# Altium PCB PCB1.PcbDoc
Units mil, origin at the board's own origin, x right, y up, seen from the top; angles counter-clockwise.
Board outline 2265 x 1515 mil, 4 copper layers (Top Layer, Layer 1, Layer 2, Bottom Layer), stack 23.756 mil thick; 41 components, 23 nets, 117 pads, 151 vias.
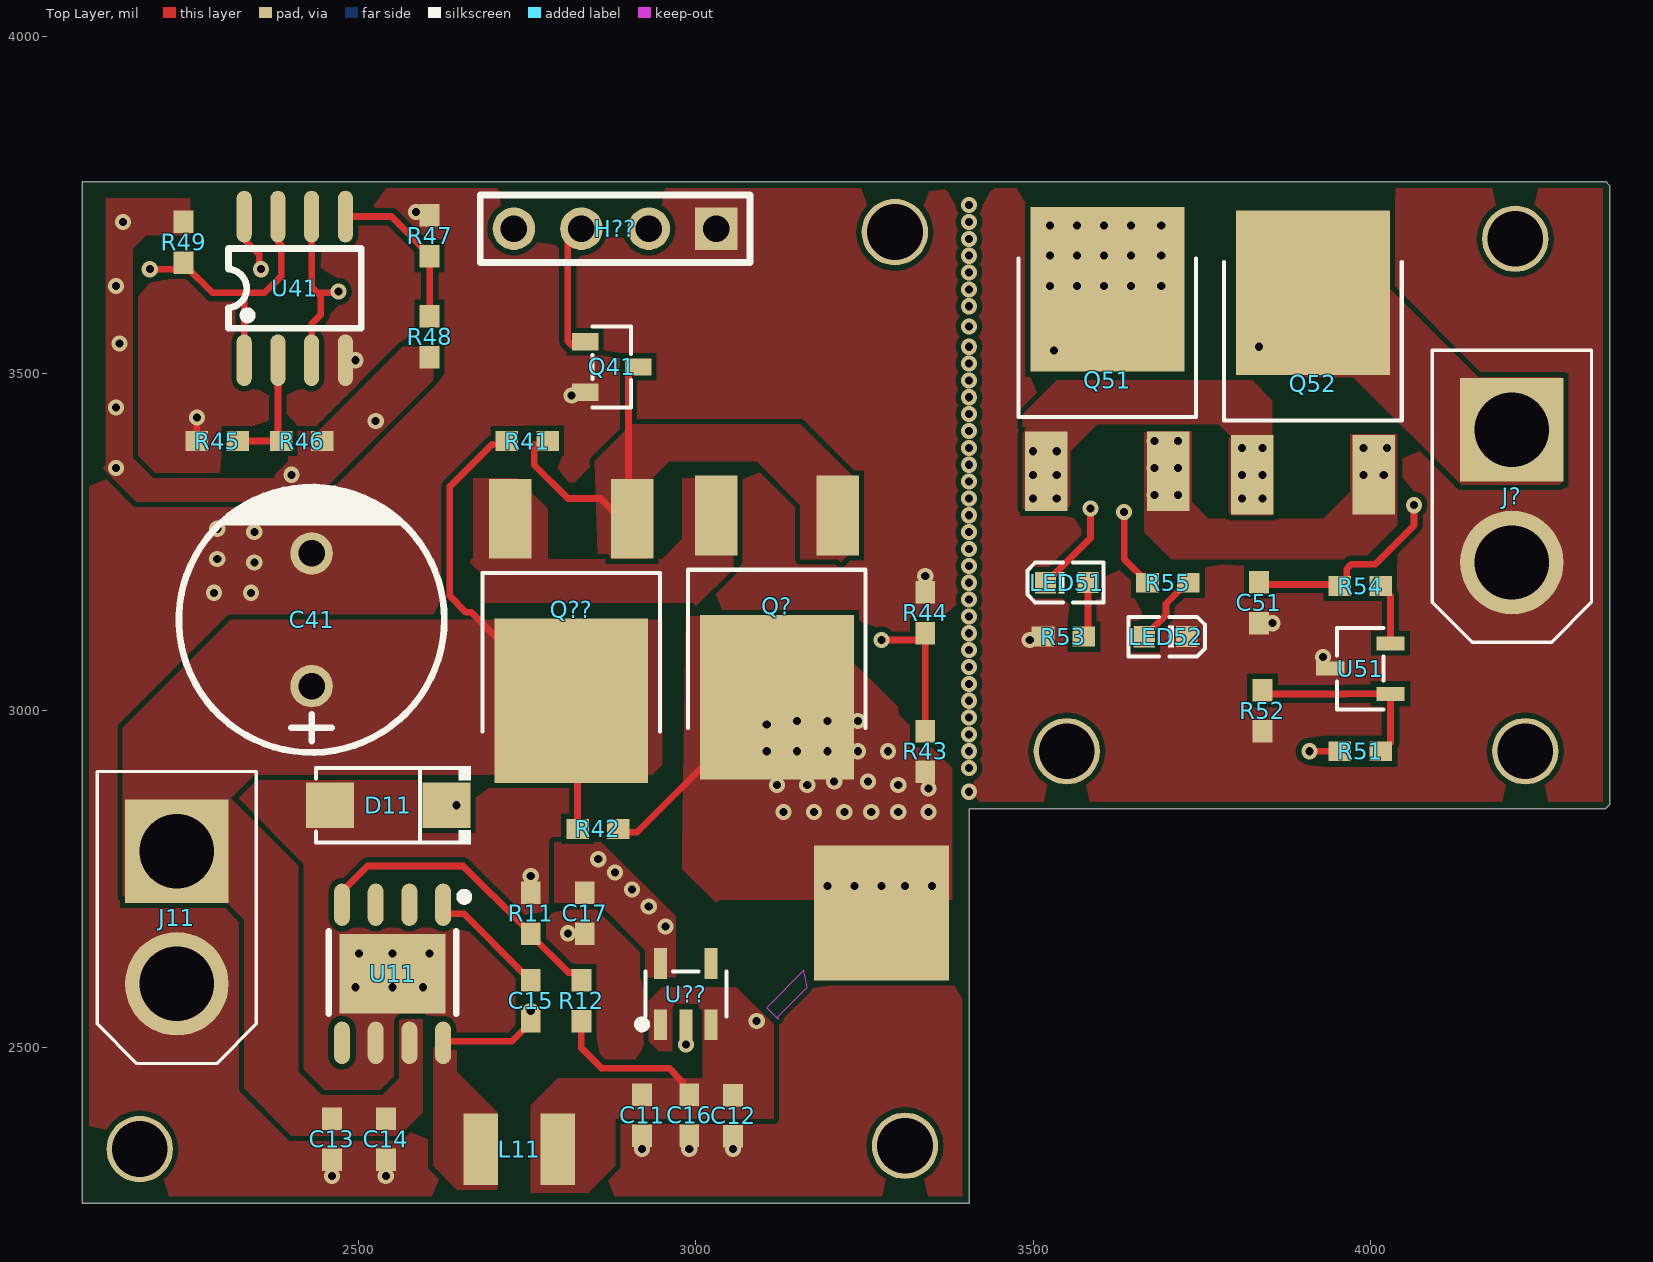
[diagram p0: Top Layer view]
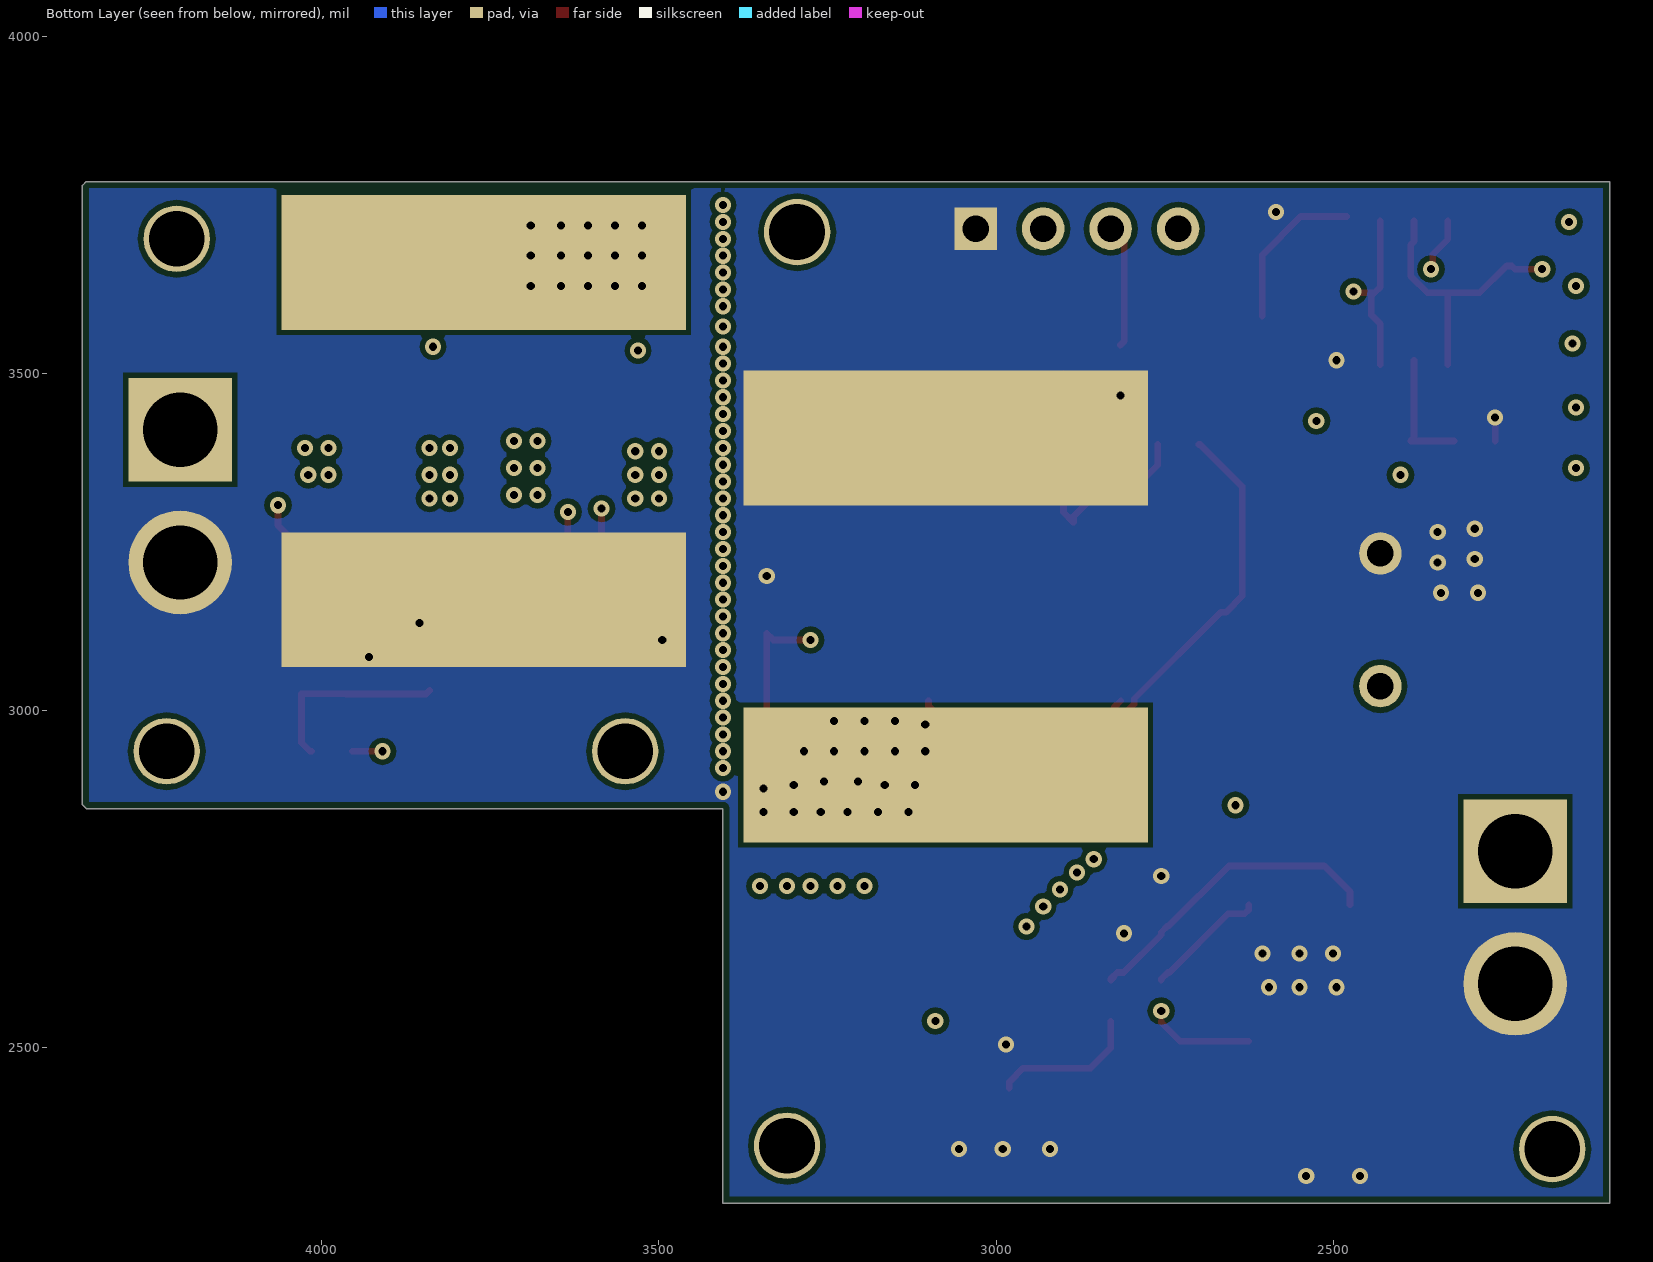
[diagram p1: Bottom Layer view, seen from below]
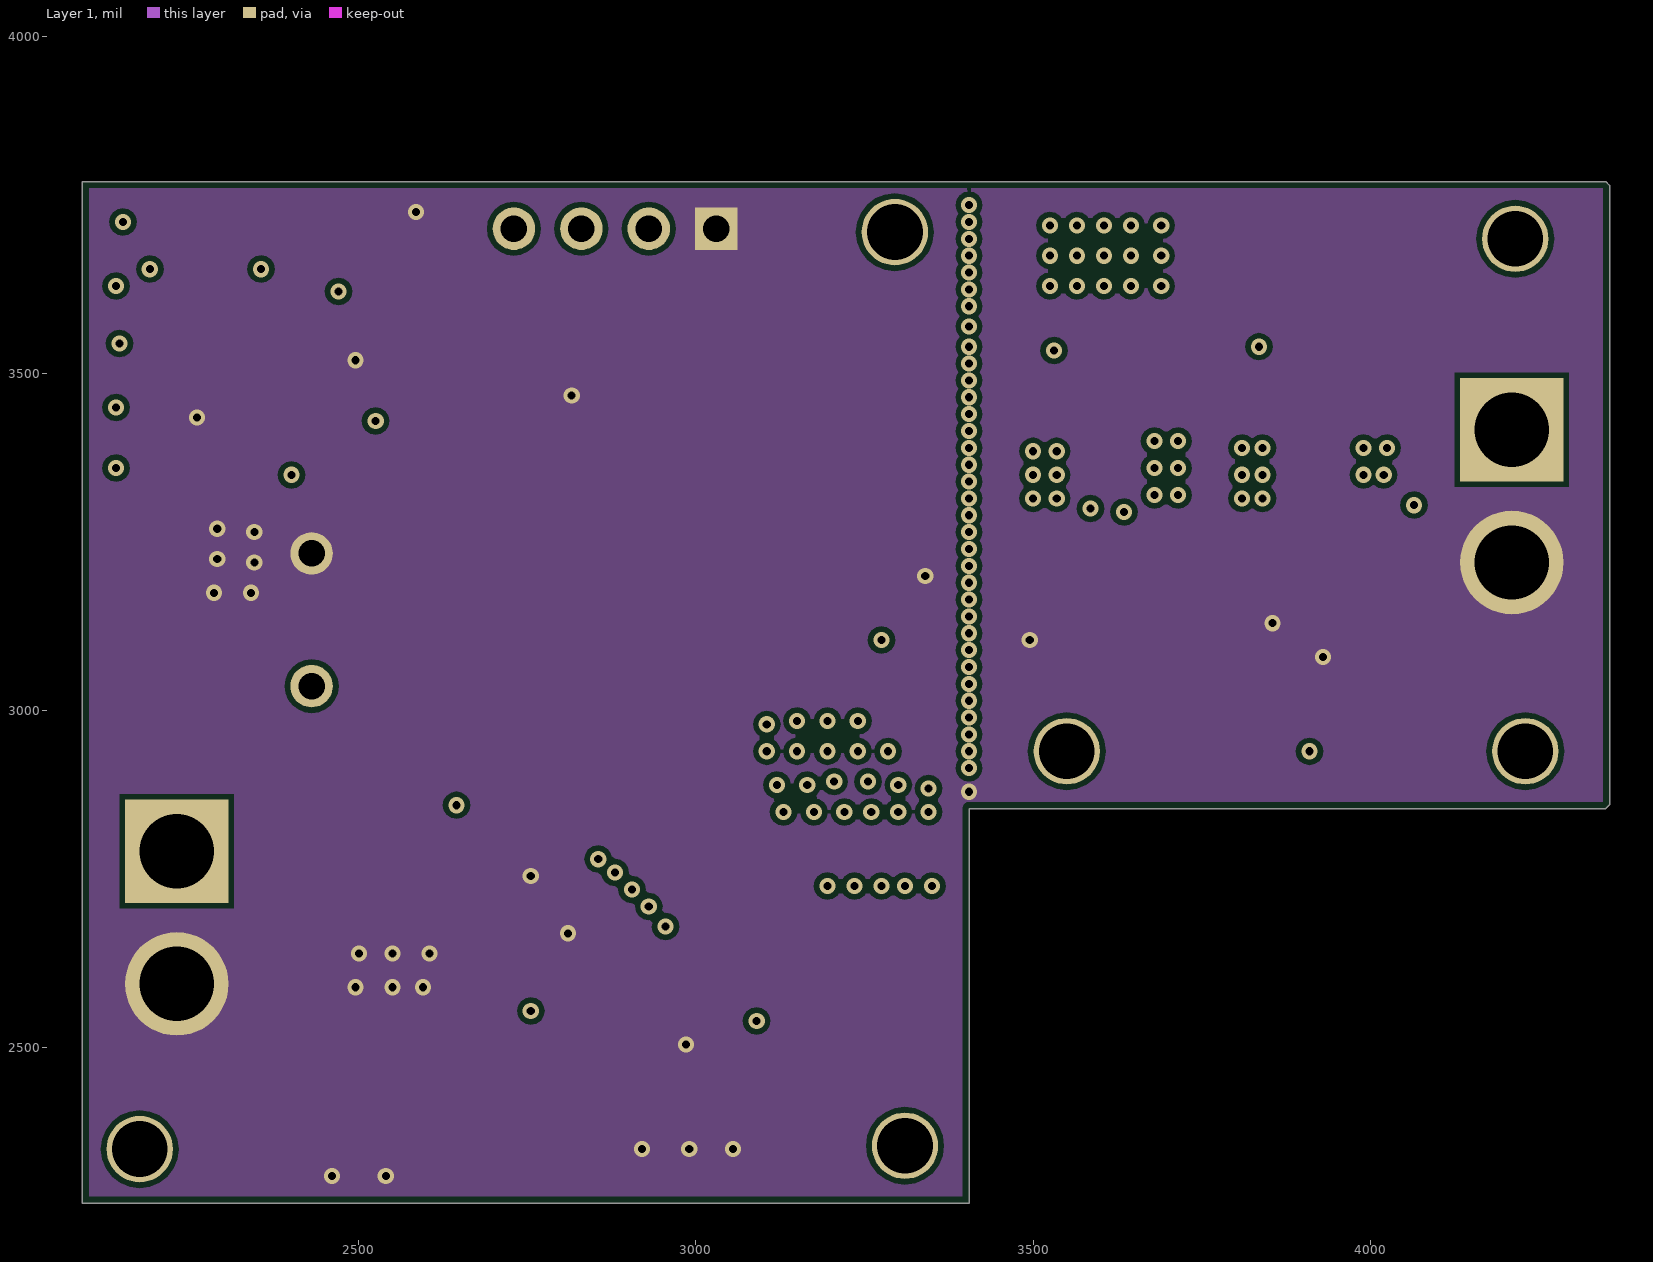
[diagram p2: Layer 1]
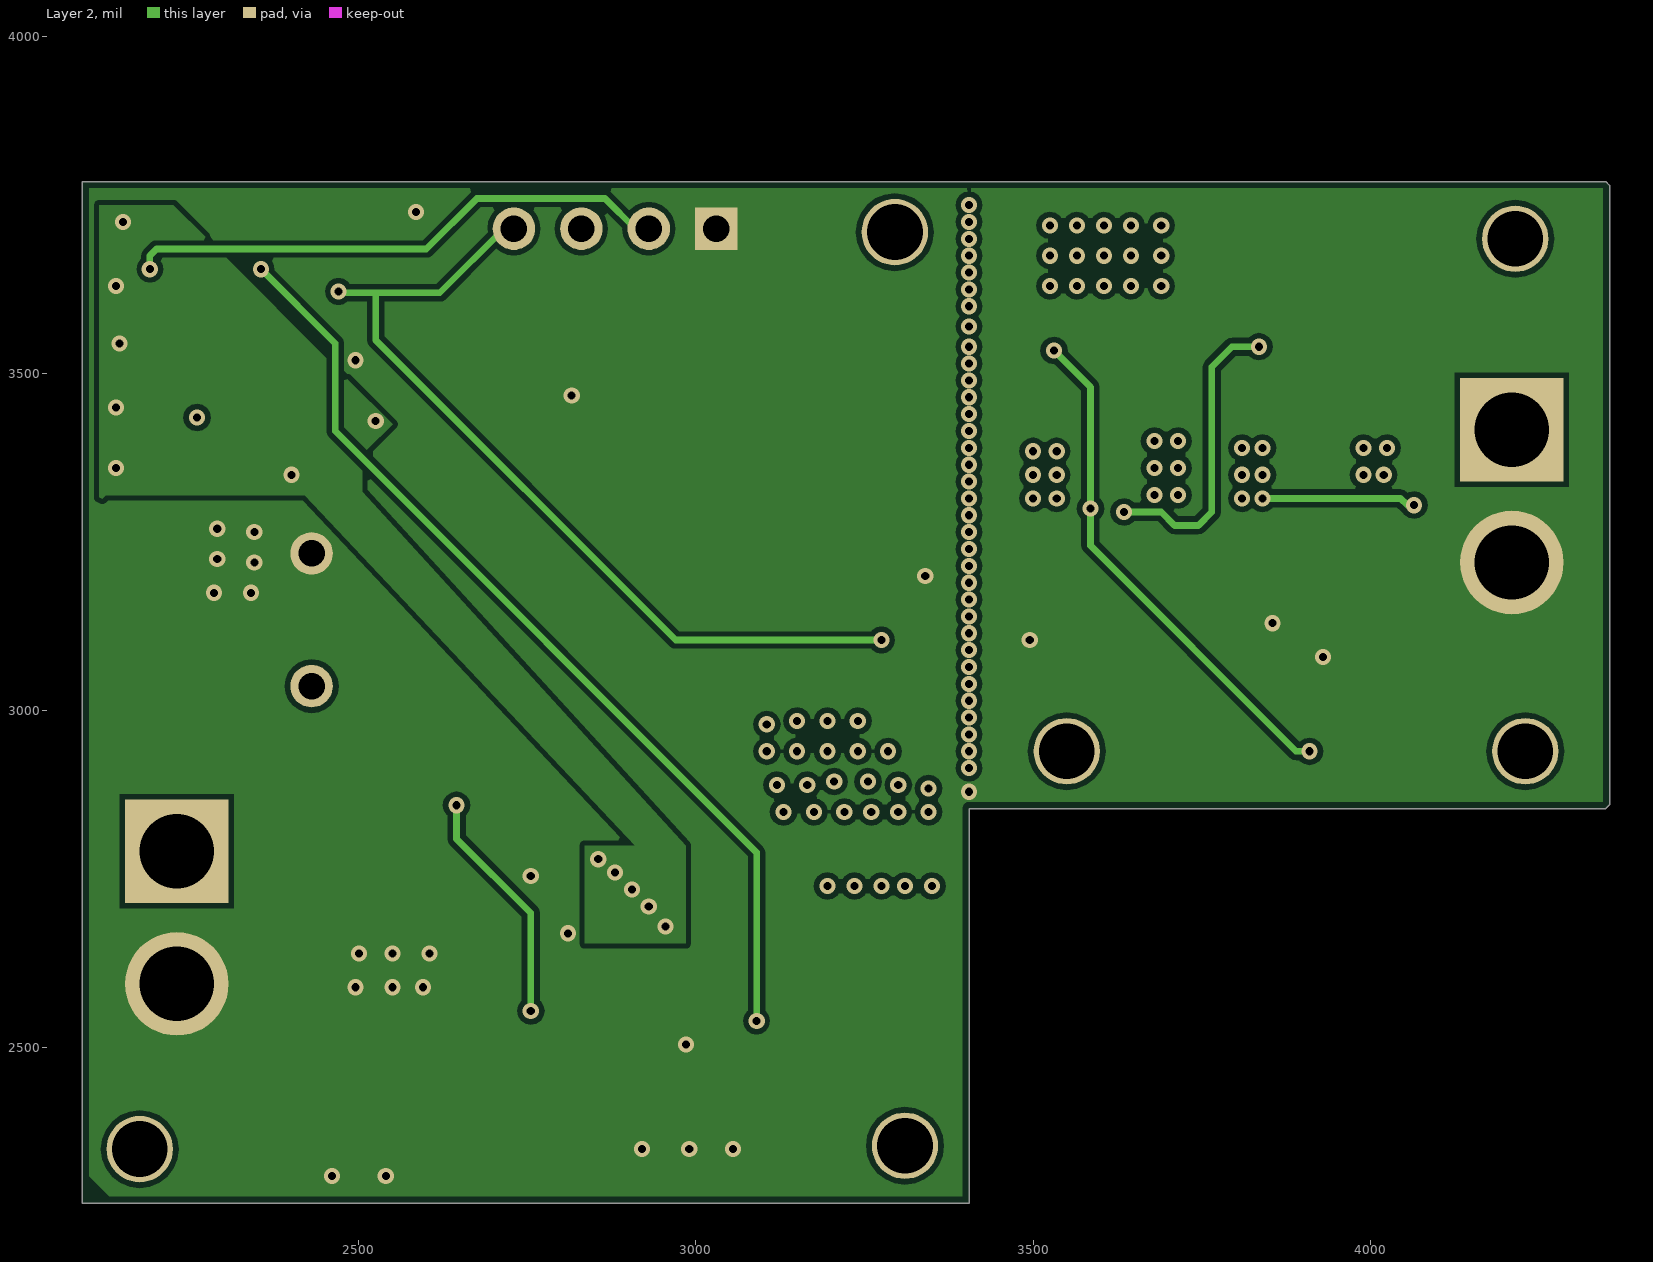
[diagram p3: Layer 2]
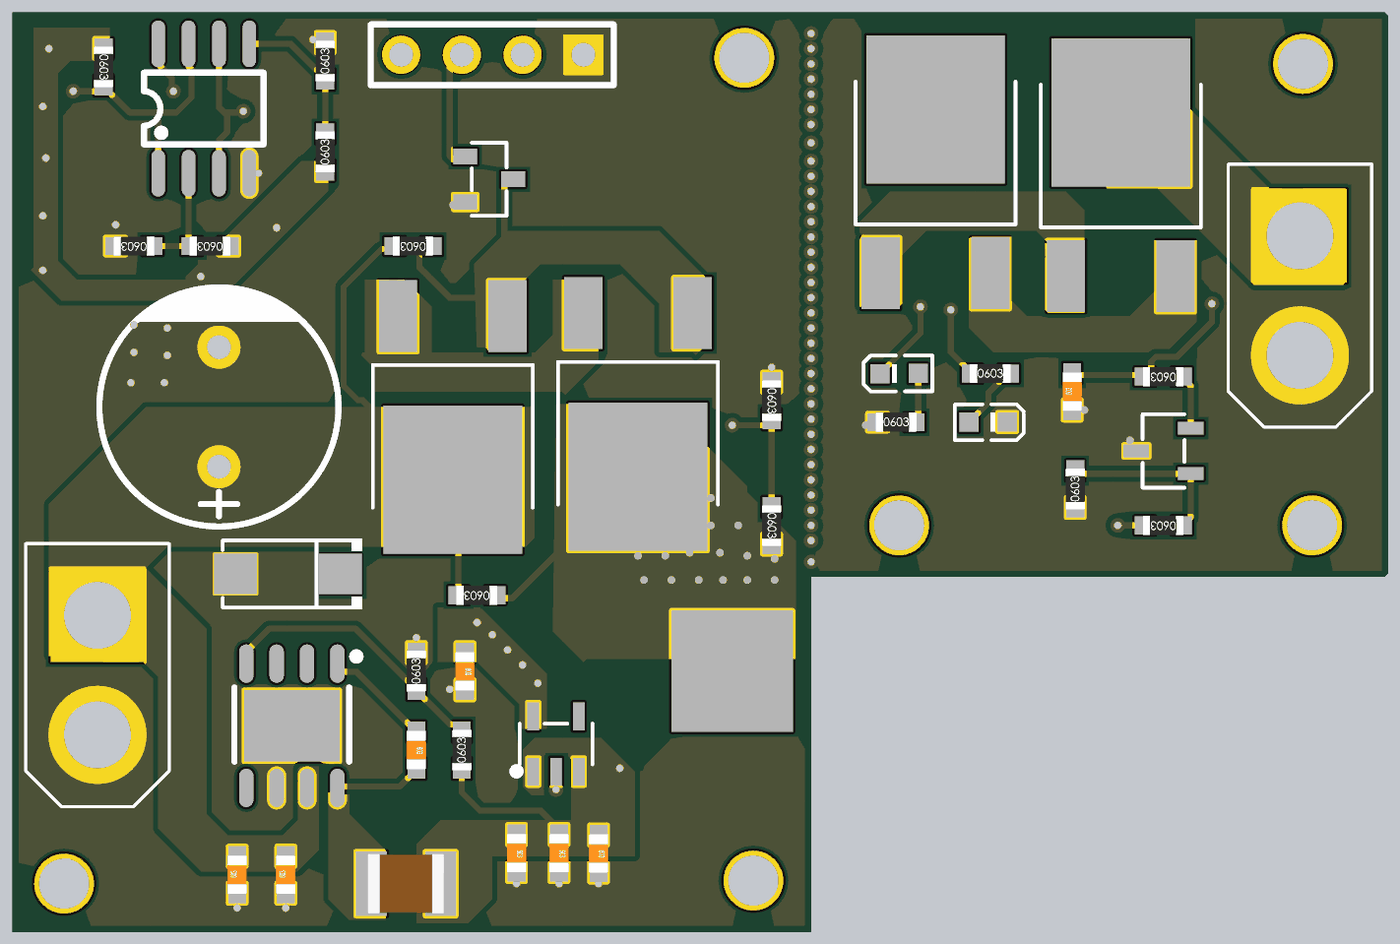
[diagram p4: 3D render of the assembled board from above, using the file's embedded part models]

## Layer stack, top to bottom
Top Solder: solder mask 0.4, Solder Resist, Dk 3.5
Top Layer: signal copper 1.4
Dielectric 2: prepreg 2.8, PP-006, Dk 4.1
Layer 1: signal copper 1.378
Dielectric 1: dielectric 12.6, FR-4, Dk 4.8
Layer 2: signal copper 1.378
Dielectric 3: prepreg 2.8, PP-006, Dk 4.1
Bottom Layer: signal copper 1.4
Bottom Solder: solder mask 0.4, Solder Resist, Dk 3.5

## Board outline
2090,2270 2090,3785 4349.14,3785 4355,3779.14 4355,2860.86 4349.14,2855 3405,2855 3405,2270

## Design rules (kind name [scope] priority, off if disabled: settings)
BoardOutlineClearance [All] p1: gap=10 ignorepadtopadclearanceinfootprint=FALSE
Clearance [All] p1: gap=8 ignorepadtopadclearanceinfootprint=TRUE except(0: Arc-Via Track-Via SMDPad-Via THPad-Via Via-Via)
HoleSize [All] p1: absolutevalues=TRUE maxlimit=200 minlimit=1 maxpercent=80.000 minpercent=20.000
HoleToHoleClearance [All] p1: gap=0 allowstackedmicrovias=TRUE
MinimumSolderMaskSliver [All] p1: minsoldermaskwidth=0
PlaneConnect [All] p1: planeconnectstyle=Direct reliefexpansion=20 reliefentries=4 reliefconductorwidth=10 reliefairgap=10
PolygonConnect [All] p1: connectstyle=Direct reliefconductorwidth=10 reliefentries=4 polygonreliefangle="90 Angle" airgapwidth=10
RoutingVias [All] p1: holewidth=12 width=24 viastyle="Through Hole" minholewidth=12 minwidth=24 maxholewidth=28 maxwidth=50
SilkToSilkClearance [All] p1: silktosilkclearance=0
SilkToSolderMaskClearance [IsPad] p1: minsilkscreentomaskgap=0 clearancetoexposedcopper=TRUE
SolderMaskExpansion [All] p1: expansion=4 istentingtop=FALSE
Width [All] p1: maxlimit=10 minlimit=10 preferedwidth=10
24 further rules are at their usual default settings.

## Classes and differential pairs
component class PAGE06_握手协议飞机端: C51 J? LED51 LED52 Q51 Q52 R51 R52 R53 R54 R55 U51
component class PAGE05_机场端协议: C41 H?? Q41 Q? Q?? R41 R42 R43 R44 R45 R46 R47 R48 R49 U41
component class PAGE02_机场端电源: C11 C12 C13 C14 C15 C16 C17 D11 J11 L11 R11 R12 U11 U??

## Components (designator, comment, footprint, x,y, rotation, side; value= is the part's Value field where it differs from the comment)
C11 "10u/0603/25V/1%" 0603_ding_C 2920,2400.32 r270 top
C12 "0.1u/0603/25V/1%" 0603_ding_C 3055,2399.68 r270 top
C13 "0.1u/0603/40V/1%" 0603_ding_C 2460,2364.68 r90 top
C14 "10u/0603/40V/1%" 0603_ding_C 2540,2364.68 r90 top
C15 "0.1u/0603/40V/1%" 0603_ding_C 2755,2570 r270 top
C16 "10u/0603/16V/10%" 0603_ding_C 2990,2400.32 r270 top
C17 "10u/0603/16V/10%" 0603_ding_C 2835,2699.68 r270 top
C41 "470uF/插件/16V/10%" CAP-TH_BD10.0-P5.00-D0.6-FD-A 2430,3135 r90 top
C51 "100n" 0603_ding_C 3835,3160.31 r90 top
D11 "1N5819" SMA_L4.4-W2.6-LS5.0-RD 2543.68,2860 r180 top
H?? "lail-pz2.54-4p-l" CONN-TH_LAIL-PZ2.54-4P-L 2880,3715 r180 top
J11 "XT30_M" XT30（立式） 2230,2693.43 r270 top
J? "XT30_M" XT30（立式） 4210,3318.43 r270 top
L11 "10uH/1210/2.5A/1%" 1210_ding_C 2737.91,2350 r0 top
LED51 "0603" LED0603-RD_GREEN 3550,3190 r0 top
LED52 "0603" LED0603-RD_GREEN 3696.47,3110.14 r180 top
Q41 "S8050(0.5A)" SOT-23-3_L2.9-W1.3-P1.90-LS2.4-BR 2875,3510 r180 top
Q51 "aod4185_c400894" TO-252-2_L6.6-W6.1-P4.57-LS9.9-BR-CW 3610,3490.2 r270 top
Q52 "aod4185_c400894" TO-252-2_L6.6-W6.1-P4.57-LS9.9-BR-CW 3915,3485.2 r270 top
Q? "aod4185_c400894" TO-252-2_L6.6-W6.1-P4.57-LS9.9-BR-CW 3120,3154.8 r90 top
Q?? "aod4185_c400894" TO-252-2_L6.6-W6.1-P4.57-LS9.9-BR-CW 2815,3149.8 r90 top
R11 "3.1k/0603/1%" 0603_ding_R 2755,2700 r90 top
R12 "10k/0603/1%" 0603_ding_R 2830,2570 r90 top
R41 "100K/0603/10%" 0603_ding_R 2749.68,3400 r180 top
R42 "10k/0603/1%" 0603_ding_R 2854.68,2825 r180 top
R43 "100k/0603/1%" 0603_ding_R 3340,2939.68 r270 top
R44 "10K/0603/1%" 0603_ding_R 3340,3145.31 r270 top
R45 "10K/0603/1%" 0603_ding_R 2290,3400 r180 top
R46 "81k/0603/1%" 0603_ding_R 2415.32,3400 r180 top
R47 "10K/0603/1%" 0603_ding_R 2605,3704.68 r90 top
R48 "51k/0603/1%" 0603_ding_R 2605,3555 r90 top
R49 "10K/0603/1%" 0603_ding_R 2240,3695 r270 top
R51 "10k" 0603_ding_R 3985,2940 r180 top
R52 "10k" 0603_ding_R 3840,3000 r90 top
R53 "10k" 0603_ding_R 3545,3110 r0 top
R54 "1k" 0603_ding_R 3985,3185 r180 top
R55 "10k" 0603_ding_R 3700,3190 r0 top
U11 "tps5430dda" SOIC-8_EP_150mil 2550,2610 r180 top
U41 "LM393" SOIC-8_L5.0-W4.0-P1.27-LS6.0-BL 2405,3626.5 r0 top
U51 "TL431" SOT-23-3_L3.0-W1.6-P1.90-LS2.8-BR 3985.32,3062.6 r0 top
U?? "spx3819m5-l-3-3/tr" SOT-23-5_L3.0-W1.7-P0.95-LS2.8-BL 2985,2580 r0 top

## Footprints (in the part's own frame and the unit in brackets; to place one, negate y for a bottom-side part, rotate by r counter-clockwise, add the part's x,y. Pads: shape width x height; smd on the part's side, far side on the other; paste and mask are expansions set on the pad)
0603_ding_C [mm]
  rect 0.85x0.75 smd: 1(-0.77,0) 2(0.77,0)
  body extent -0.8,-0.4 0.8,0.4, height 0.3
0603_ding_R [mm]
  rect 0.85x0.75 smd: 1(-0.77,0) 2(0.77,0)
  body extent -0.85,-0.4 0.85,0.4, height 0.56
1210_ding_C [mm]
  rect 1.3x2.7 smd: 1(-1.45,0) 2(1.45,0)
  body extent -1.6,-1.25 1.6,1.25, height 1.3
CAP-TH_BD10.0-P5.00-D0.6-FD-A [mm]
  round 1.6 hole 1: 1(-2.5,0) 2(2.5,0)
  silkscreen extent -5,-5 5.08,5
CONN-TH_LAIL-PZ2.54-4P-L [mm]
  rect 1.6x1.6 hole 1 paste+0 mask+0.051: 1(-3.81,0)
  round 1.6 hole 1 paste+0 mask+0.051: 2(-1.27,0) 3(1.27,0) 4(3.81,0)
  silkscreen extent -5.08,-1.27 5.08,1.27
LED0603-RD_GREEN [mm]
  rect 0.8x0.8 smd: 1(-0.799,-0.003) 2(0.799,0.003)
  silkscreen extent -1.49,-0.75 1.39,0.76
SMA_L4.4-W2.6-LS5.0-RD [mm]
  rect 1.8x1.7 smd paste+0 mask+0.051: 1(-2.192,0) 2(2.192,0)
  silkscreen extent -3.11,-1.48 2.73,1.48
SOIC-8_EP_150mil [mm]
  oval 0.6x1.6 smd: 1(-1.905,-2.6) 2(-0.635,-2.6) 3(0.635,-2.6) 4(1.905,-2.6) 5(1.905,2.6) 6(0.635,2.6) 7(-0.635,2.6) 8(-1.905,2.6)
  rect 4x3 smd: GND(0,0)
  silkscreen extent -2.85,-3.05 2.4,1.5
SOIC-8_L5.0-W4.0-P1.27-LS6.0-BL [mil]
  oval 22.38x76.78 smd: 1(-75,-106.5) 2(-25,-106.5) 3(25,-106.5) 4(75,-106.5) 5(75,106.5) 6(25,106.5) 7(-25,106.5) 8(-75,106.5)
  silkscreen extent -98,-59 98,59
SOT-23-3_L2.9-W1.3-P1.90-LS2.4-BR [mm]
  rect 1x0.65 smd: 1(1,-0.95) 2(1,0.95) 3(-1,0)
  silkscreen extent -0.73,-1.53 0.73,1.53
SOT-23-3_L3.0-W1.6-P1.90-LS2.8-BR [mm]
  rect 1.07x0.532 smd: 1(1.135,-0.95) 2(1.135,0.95) 3(-1.135,0)
  silkscreen extent -0.88,-1.54 0.88,1.54
SOT-23-5_L3.0-W1.7-P0.95-LS2.8-BL [mm]
  rect 0.49x1.157 smd: 1(-0.95,-1.154) 2(0,-1.154) 3(0.95,-1.154)
  rect 0.49x1.175 smd: 4(0.95,1.154) 5(-0.95,1.154)
  silkscreen extent -1.8,-1.29 1.53,0.85
TO-252-2_L6.6-W6.1-P4.57-LS9.9-BR-CW [mm]
  rect 3x1.6 smd: 1(3.424,-2.29) 3(3.424,2.29)
  rect 6.2x5.8 smd: 2(-3.424,0)
  silkscreen extent -4.58,-3.35 1.38,3.35
XT30（立式） [mm] "方形为正，无3D模型"
  rect 3.9x3.9 hole 2.8: 1(-2.5,0)
  round 3.9 hole 2.8: 2(2.5,0)
  silkscreen extent -5.5,-3 5.5,3

## Part data
C11 C12 C13 C14 C15 C16 C17 C51: library part C
C41: library part Cbig
H??: "插针结构:1x4P;间距:2.54mm;圆针/方针:方针;安装方式:直插;排数:单排;总PIN位数:4P;额定电流:3A;额定电压:250V;配合针长度:6mm;塑高:2.5mm;端接针长度:3mm;触头材质:黄铜;触头镀层:金;工作温度:-25℃~+80℃;颜色:黑色;", Color=黑色, Current Rating=3A, JLCPCB Part Class="Extended Part", LCSC Part Name="1x4P 间距:2.54mm 方针 直插", Manufacturer=LAILAN(莱联), ManufacturerPart=LAIL-PZ2.54-4P-L, Operating Temperature=-25℃~+80℃, Voltage Rating (Max)=250V, AddInBom=yes, Circluar Pins/Square Pins=方针, Contact Material=黄铜, Contact Plating=金, ConvertToPcb=yes, Datasheet=https://item.szlcsc.com/datasheet/LAIL-PZ2.54-4P-L/58519955.html, FootprintName=CONN-TH_LAIL-PZ2.54-4P-L, Insulation Height=2.5mm, Length of End Connection Pin=3mm, Length of Mating Pin=6mm, ModelId=112b012cb4004446aa5386c9c86d05f0, ModelName=CONN-TH_LAIL-PZ2.54-4P-L, ModelTransform=400.039,100,0,0,0,0,0,0,-118.11, Mounting Type=直插, Number of Pins=4P, Number of Rows=单排, Pin Structure=1x4P, Pitch=2.54mm, Supplier=LCSC, Supplier Footprint=插件,P=2.54mm, SupplierPart=C54950602, SymbolName=LAIL-PZ2.54-4P-L
L11: library part L-ip6826
LED51 LED52: library part LED0603
Q41: library part s8050(0.5a), "晶体管类型:NPN;集电极电流(Ic):500mA;集射极击穿电压(Vceo):25V;耗散功率(Pd):300mW;直流电流增益(hFE):120;", Collector - Emitter Voltage VCEO=25V, Current - Collector Cutoff=100nA, Current - Collector(Ic)=500mA, DC Current Gain=120, Emitter-Base Voltage(Vebo)=5V, JLCPCB Part Class="Extended Part", LCSC Part Name="电流:0.5A 电压:25V", Manufacturer=EIC, Pd - Power Dissipation=300mW, Transition frequency(fT)=150MHz, AddInBom=yes, ConvertToPcb=yes, Datasheet=https://item.szlcsc.com/datasheet/S8050(0.5A)/3524496.html, FootprintName=SOT-23-3_L2.9-W1.3-P1.90-LS2.4-BR, ManufacturerPart=S8050(0.5A), ModelId=c62791f0466c4ae2a892c056b845b0ca, ModelName=SOT-23-3P_L2.9-W1.3-H1.0-LS2.4-P0.95, ModelTransform=98.425,114.173,0,180,0,0,0.0005,-0.0005,0, Number=1个NPN, Supplier=LCSC, Supplier Footprint=SOT-23, SupplierPart=C3014350, Symbol=S8050(0.5A), type=NPN, Vce Saturation(VCE(sat))=600mV
Q51 Q52 Q? Q??: "数量:1个P沟道;漏源电压(Vdss):40V;连续漏极电流(Id):40A;导通电阻(RDS(on)):15mΩ@10V;耗散功率(Pd):62.5W;阈值电压(Vgs(th)):3V;", Current - Continuous Drain(Id)=40A, Drain to Source Voltage=40V, Gate Threshold Voltage (Vgs(th))=3V, Input Capacitance(Ciss)=2.55nF, JLCPCB Part Class="Extended Part", LCSC Part Name="1个P沟道 耐压:40V 电流:40A", Manufacturer=AOS, ManufacturerPart=AOD4185, Operating Temperature=-55℃~+175℃, Output Capacitance(Coss)=280pF, Pd - Power Dissipation=62.5W, Reverse Transfer Capacitance (Crss@Vds)=190pF, AddInBom=yes, Configuration=-, ConvertToPcb=yes, Datasheet=https://item.szlcsc.com/datasheet/AOD4185/385415.html, FootprintName=TO-252-3_L6.6-W6.1-P4.57-LS9.9-BR-CW, Gate Charge(Qg)=55nC@10V, ModelId=dee852f3c6b348a2b9d5be5dd3244081, ModelName=TO-252-3_L6.6-W6.1-P4.57-LS9.9-BR-CW, ModelTransform=258.97184,390.1567,0,90,0,0,-35.433,0,0, Number=1个P沟道, RDS(on)=15mΩ@10V, Supplier=LCSC, Supplier Footprint=TO-252(DPAK), SupplierPart=C400894, Symbol=AOD4185_C400894, type=P沟道, Vgs=±20V
R11 R12 R41 R42 R43 R44 R45 R46 R47 R48 R49 R51 R52 R53 R54 R55: library part RES
U11: "功能类型:降压型;工作电压:5.5V~36V;输出电压:1.221V~32.04V;输出电流:3A;输出类型:可调;", Frequency - Switching=500kHz, JLCPCB Part Class="Extended Part", LCSC Part Name="降压型 3A 5.5V~36V", Manufacturer=TI(德州仪器), ManufacturerPart=TPS5430DDA, Operating Temperature=-40℃~+125℃@(TJ), Output Current=3A, Output Voltage=1.221V~32.04V, Quiescent Current=4.4mA, Voltage - Supply=5.5V~36V, AddInBom=yes, ConvertToPcb=yes, Datasheet=https://www.ti.com/cn/lit/ds/symlink/tps5430.pdf, Features=逐波限流；过流保护；打嗝限流, FootprintName=ESOP-8_L4.9-W3.9-P1.27-LS6.0-BL-EP-2, Function=降压型, ModelId=0078439d9e964752ad4b3f828dcb5664, ModelName=ESOP-8_L4.9-W3.9-P1.27-LS6.0-BL-EP-2, ModelTransform=192.913,236.22,0,0,0,0,0,0,0, Number of Outputs=1, Output Type=可调, Supplier=LCSC, Supplier Footprint=ESOP-8, SupplierPart=C502477, Switch tube (built-in/external)=内置, Symbol=TPS5430DDA, Synchronous Rectifier=否, Topology=降压式
U??: "输出极性:正极;工作电压:16V;输出电压:3.3V;输出电流:500mA;电源纹波抑制比(PSRR):70dB;输出类型:固定;", JLCPCB Part Class="Extended Part", LCSC Part Name="3.3V 500mA 16V", Manufacturer=MaxLinear(迈凌), ManufacturerPart=SPX3819M5-L-3-3/TR, Operating Temperature=-40℃~+125℃, Output Current=500mA, Output Voltage=3.3V, Power Supply Rejection Ratio (PSRR)=70dB, standby current=90uA, Voltage - Supply=16V, Voltage Dropout=340mV@(500mA), AddInBom=yes, ConvertToPcb=yes, Datasheet=https://item.szlcsc.com/datasheet/SPX3819M5-L-3-3%252FTR/9575.html, Features=过流保护；反极性电压保护；使能控制；噪声旁路端子；热关断, FootprintName=SOT-23-5_L3.0-W1.7-P0.95-LS2.8-BL, ModelId=0a2a1b8f50944f73965918ad6e5fe167, ModelName=SOT-23-5_L2.9-W1.6-H1.1-LS2.8-P0.95, ModelTransform=118.60433,114.173,0,90,0,0,0.0005,0.0005,0, Noise=40uVrms, Number of Outputs=1, Output Configuration=正极, Output Type=固定, Supplier=LCSC, Supplier Footprint=SOT-23-5, SupplierPart=C9055, Symbol=SPX3819M5-L-3-3/TR

## Free pads (board coordinates)
  rect 200x200 smd: 2(3275,2700)
  round 98.43 hole 82.68: 3(2175,2350) 3(3295,3710) 3(3310,2355) 3(3550,2940) 3(4215,3700) 3(4230,2940)
  rect 600x200 smd far side: 3(3074.75,3404.65) 3(3759.75,3164.65) 3(3759.75,3664.65) +24v_(3074.75,2904.65)

## Via types
v1: diameter 24, hole 12, Top Layer to Bottom Layer, tented both sides, 151 vias

## Nets (pads, with @x,y where several pads share a name; then routed paths per layer and width w, separated by ;. In a path a pad name is that pad's centre, name@x,y a point inside that pad or via, vN(x,y) a via of type N, cw(c..) or ccw(c..) an arc to the next point about the centre after c; other vN are vias at no path point)
4_VSENSE: H??.4 R43.1 R44.2 U41.3 U41.6 | length 1774.8
  Top Layer w10: U41.3@2430,3513.5 U41.3 2430,3573.9 2443.6,3587.5 2443.6,3614.98 2438.58,3620 ; U41.6@2430,3726.5 2430,3628.58 2438.58,3620 ; v1(2470,3622) 2468,3620 2438.58,3620 ; v1(3275,3105) 3330.24,3105 3340,3114.76 R43.1
  Layer 2 w10: v1(2470,3622) 2472,3620 2525,3620 ; H??.4 2715,3715 2620,3620 2525,3620 ; v1(3275,3105) 2970,3105 2525,3550 2525,3620
+3.3V: C17.1 R46.1 R48.1 R49.1 U??.5
  other v1: 2955,2680 2930,2710 2905,2735 2880,2760 2855,2780 2400,3350 2140,3360 2525,3430 2140,3450 2145,3545 2140,3630 2150,3725
+24V: C13.2 C14.2 C41.1 J11.1 Q??.2 R41.2 R42.2 U11.7 | length 690.8
  Top Layer w10: 2699.37,3395 2697.4,3395 2635,3332.6 2635,3170 2658.98,3146.02 2666.85,3146.02 2795,3017.87 2795,3010 Q??.2@2804.37,3000.63 ; Q??.2 2824.37,3005.63 R42.2
+24V_C: pad.2 pad.+24v_ Q?.2 R42.1 R43.2 | length 300.4
  Top Layer w10: R42.1@2885,2820 2912.87,2820 3100,3007.13 Q?.2@3100,3015
  other v1: 3195,2740 3235,2740 3275,2740 3310,2740 3350,2740 3130,2850 3175,2850 3220,2850 3260,2850 3300,2850 3345,2850 3345,2885 3120,2890 3165,2890 3300,2890 3205,2895 3255,2895 3105,2940 3150,2940 3195,2940 3240,2940 3285,2940 3105,2980 3150,2985 3195,2985 3240,2985
+24V_C1: J?.1 Q52.2 R55.1 | length 565.6
  Top Layer w10: v1(3635,3295) 3635,3225.32 3670,3190.32 R55.1 R55.1@3671.65,3190
  Layer 2 w10: v1(3635,3295) 3690,3295 3710,3275 3745,3275 3765,3295 3765,3510 3795,3540 v1(3835,3540)
+24V_C_: LED51.1 pad.3@3759.75,3664.65 Q51.2 R51.2 | length 967.7
  Top Layer w10: LED51.1 3585,3256.34 v1(3585,3300) ; Q51.2@3595,3610 Q51.2 ; v1(3910,2940) R51.2
  Layer 2 w10: v1@3530,3535 3585,3480 3585,3245 3890,2940 v1(3910,2940)
  other v1: 3531.06,3534.23 3525,3630 3565,3630 3605,3630 3645,3630 3690,3630 3525,3675 3565,3675 3605,3675 3645,3675 3690,3675 3525,3720 3565,3720 3605,3720 3645,3720 3690,3720
EN_4: H??.3 Q41.1 | length 183.2
  Top Layer w10: 2815.63,3542.4 2810,3548.03 2810,3695 H??.3
GND: C11.2 C12.2 C13.1 C14.1 C16.2 C17.2 C41.2 C51.1 D11.2 H??.1 J11.2 J?.2 LED52.1 pad.3@3074.75,3404.65 pad.3@3759.75,3164.65 Q41.2 R11.2 R44.1 R45.2 R47.2 R52.1 R53.1 U11.6 U11.GND U41.4 U51.3 U??.2 | length 53
  Top Layer w10: R45.2 2259.69,3434.69 v1(2260,3435) ; v1(2815.63,3467.6) 2822.52,3467.6 Q41.2@2830.32,3475.4
  other v1: 2460,2310 2540,2310 2920,2350 2990,2350 3055,2350 2985,2505 2495,2590 2550,2590 2595,2590 2500,2640 2550,2640 2605,2640 2810,2670 2755,2755 3405,2880 3930,3080 3495,3105 3855,3130 2285,3175 2340,3175 3340,3200 2345,3220 2290,3225 2345,3265 2290,3270 2495,3520 2585,3740
NetC15_1: C15.1 U11.1 | length 181.7
  Top Layer w10: U11.1 2625,2705.34 2631.29,2699.05 2655.95,2699.05 2742.95,2612.05 2745.24,2612.05 2755,2602.28 C15.1
NetC15_2: C15.2 D11.1 L11.1 U11.8 | length 494
  Top Layer w10: U11.8@2625,2510 2727.28,2510 2755,2537.72 C15.2
  Layer 2 w10: v1(2645,2860) 2645,2810 2755,2700 v1(2755,2555)
NetC51_2: C51.2 Q51.1 Q52.1 R54.2 | length 537.7
  Top Layer w10: C51.2 3838.13,3187.5 3952.18,3187.5 R54.2 3955.24,3185 3965,3194.76 3965,3210 3972.5,3217.5 4007.5,3217.5 4065,3275 v1(4065,3305)
  Layer 2 w10: v1(3840,3315) 4045,3315 4055,3305 v1(4065,3305)
  other v1: 3500,3315 3535,3315 3810,3315 3500,3350 3535,3350 3810,3350 3840,3350 3500,3385 3535,3385 3810,3390 3840,3390
NetLED51_2: LED51.2 R53.2 | length 82.7
  Top Layer w10: R53.2 3581.47,3116.16 LED51.2
NetLED52_2: LED52.2 R55.2 | length 108.2
  Top Layer w10: LED52.2 3697.17,3142.17 3697.17,3158.82 3728.35,3190 R55.2
NetQ41_3: Q41.3 Q?.1 Q??.1 R41.1 | length 421.6
  Top Layer w10: 2760,3395 2760,3365 2810,3315 2858.66,3315 2885.16,3288.5 2885.16,3279.61 2900,3294.45 Q41.3@2900,3499.37
NetQ51_3: Q51.3 Q52.3
  other v1: 3680,3320 3715,3320 3990,3350 4020,3350 3680,3360 3715,3360 3990,3390 4025,3390 3680,3400 3715,3400
NetQ??_3: Q?.3 Q??.3
NetR11_1: R11.1 R12.2 U11.4 | length 470.3
  Top Layer w10: U11.4 2475,2732.05 2512.95,2770 2654.68,2770 2743.27,2681.42 2745.24,2681.42 2755,2671.65 R11.1 2755,2667.72 2810.67,2612.05 2820.24,2612.05 2830,2602.28 R12.2 R12.2@2825.63,2604.68
NetR45_1: R45.1 R46.2 U41.2 | length 186.8
  Top Layer w10: R45.1 R46.2 2380,3405 U41.2
NetR47_1: R47.1 R48.2 U41.5 | length 239.5
  Top Layer w10: U41.5 2548.34,3733 2605,3676.34 R47.1 R48.2
NetR51_1: R51.1 R52.2 U51.1 | length 284.7
  Top Layer w10: R52.2 3845.32,3025 3964.6,3025 3964.8,3025.2 U51.1 4030,2952.72 4017.28,2940 R51.1
NetR54_1: R54.1 U51.2 | length 92.2
  Top Layer w10: R54.1 4017.28,3185 4027.05,3175.24 4027.05,3173.27 4030,3170.32 U51.2
OK: H??.2 R49.2 U41.1 U41.7 | length 1212.8
  Top Layer w10: v1(2190,3655) 2230.31,3655 2235.16,3659.84 2242.87,3659.84 2282.72,3620 2330,3620 ; U41.1@2330,3513.5 2330,3620 ; U41.7@2380,3726.5 2380,3695.95 2385,3690.95 2385,3645 2360,3620 2330,3620
  Layer 2 w10: v1(2190,3655) 2190,3675 2200,3685 2600,3685 2675,3760 2865,3760 2910,3715 H??.2@2910,3710
VCC: C11.1 C12.1 C16.1 L11.2 R12.1 U41.8 U??.1 U??.3 | length 1728.5
  Top Layer w10: U41.8@2330,3726.5 2330,3699.3 2352.32,3676.98 2352.32,3657.68 v1(2355,3655) ; R12.1 2830,2500 2860,2470 2960,2470 2980.24,2449.76 C16.1@2980.24,2440.39
  Layer 2 w10: v1@2350,3660 v1(2355,3655) 2465,3545 2465,3415 3090,2790 v1(3090,2540)
pads on no net: U11.2 U11.3 U11.5 U??.4
copper on no net:
  other v1: 3405,2915 3405,2940 3405,2965 3405,2990 3405,3015 3405,3040 3405,3065 3405,3090 3405,3115 3405,3140 3405,3165 3405,3190 3405,3215 3405,3240 3405,3265 3405,3290 3405,3315 3405,3340 3405,3365 3405,3390 3405,3415 3405,3440 3405,3465 3405,3490 3405,3515 3405,3540 3405,3570 3405,3600 3405,3625 3405,3650 3405,3675 3405,3700 3405,3725 3405,3750

## Polygon pours and split planes (outlines as drawn)
GND on Top Layer "GND_L01_P029" (solid, remove dead copper, pour order 29): 1875,3960 1950,3885 4560,3885 4560,2610 3935,1985 2390,1985 1900,2475 1900,2460
+24V on Top Layer "+24V_L01_P011" (solid, pour order 11): 2150,2725 2310,2725 2310,2870 2345,2905 2935,2905 2950,2920 2950,3135 2310,3135 2150,2975
+3.3V on Top Layer "+3.3V_L01_P013" (solid, pour order 13): 2250,3760 2250,3705 2185,3705 2165,3685 2165,3375 2195,3345 2375,3345 2375,3350 2395,3370 2395,3415 2440,3415 2565,3540 2610,3540 2610,3490 2430,3310 2170,3310 2120,3360 2125,3365 2125,3760
+24V_C1 on Top Layer "+24V_C1_L01_P024" (solid, pour order 24): 4025,3630 4160,3495 4285,3495 4285,3340 4280,3335 4135,3335 3975,3495 3885,3495
NetQ??_3 on Top Layer "NETQ??_3_L01_P000" (solid, pour order 0): 2670,3345 2735,3345 2780,3300 2780,3225 2950,3225 2980,3255 2980,3345 3045,3345 3055,3335 3055,3210 3000,3155 2995,3160 2685,3160 2685,3200 2660,3225 2670,3225
NetQ51_3 on Top Layer "NETQ51_3_L01_P023" (solid, pour order 23): 3670,3415 3735,3415 3735,3310 3760,3285 3930,3285 3970,3325 3970,3410 4040,3410 4040,3275 3990,3225 3705,3225 3665,3265 3665,3420
NetC51_2 on Top Layer "NETC51_2_L01_P022" (solid, pour order 22): 3490,3420 3485,3415 3485,3300 3550,3300 3555,3305 3555,3385 3595,3425 3775,3425 3795,3405 3790,3405 3790,3295 3795,3290 3855,3290 3855,3460 3825,3490 3535,3490 3485,3440 3485,3410
VCC on Top Layer "Top Layer-VCC" (solid, pour order 20): 2755,2285 2840,2285 2880,2325 2880,2395 3115,2395 3115,2455 3115,2535 3060,2590 2950,2590 2930,2570 2930,2510 2945,2495 2965,2495 2965,2560 2970,2565 3005,2565 3005,2560 3010,2555 3010,2455 2795,2455 2755,2415
NetQ41_3 on Top Layer "NETQ41_3_L01_P001" (solid, pour order 1): 2855,3220 2860,3225 2926.66,3225 2926.66,3336.66 2960,3370 3090,3370 3155,3305 3155,3225 3210,3225 3215,3220 3230,3235 3230,3350 3155,3425 2905,3425 2850,3370
+24V_C on Top Layer "+24V_C_L01_P012" (solid, pour order 12): 2985,3140 3215,3140 3215,3090 3300,3005 3300,2995 3380,2915 3380,2720 3035,2720 3030,2715 2980,2765 2980,2795
NetC15_2 on Top Layer "NETC15_2_L01_P004" (solid, pour order 4): 2610,2545 2645,2545 2645,2465 2705,2405 2705,2290 2645,2290 2610,2325
+3.3V on Top Layer "+3.3V_L01_P010" (solid, pour order 10): 2790,2755 2790,2715 2855,2715 2925,2645 2925,2605 2970,2605 2970,2695 2860,2805 2790,2805
+24V on Top Layer "+24V_L01_P002" (solid, pour order 2): 2155,2870 2310,2870 2410,2770 2410,2465 2445,2430 2535,2430 2560,2455 2560,2540 2570,2550 2595,2550 2595,2405 2560,2370 2400,2370 2330,2440 2330,2690 2305,2715 2155,2715
GND on Layer 1 "GND_L02_P031" (solid, pour order 31): 1800,3300 1800,3525 2095,3820 4370,3820 4370,2830 4125,2585 3470,2585 3470,2305 3345,2180 3325,2200 1470,2200
GND on Layer 1 "GND_L02_P014" (solid, pour order 14): 2095,3785 2095,2275 2090,2270 3400,2270 3400,3770 3380,3790
GND on Layer 2 "GND_L03_P030" (solid, pour order 30): 1885,3985 1960,3910 4570,3910 4570,2635 3945,2010 2400,2010 1910,2500 1910,2485
+3.3V on Layer 2 "Layer 2-+3.3V" (solid, pour order 19): 2115,3310 2125,3320 2420,3320 2910,2800 2835,2800 2835,2655 2985,2655 2985,2800 2505,3325 2505,3380 2550,3425 2225,3750 2115,3750
GND on Bottom Layer "GND_L04_P032" (solid, pour order 32): 1845,3930 1870,3905 4470,3905 4470,2960 4605,2825 4170,2390 3910,2390 3595,2075 3500,2170 1800,2170

## Keep-outs
Top Layer:
  region: 3160,2615 3105,2560 3122.21,2542.79 3122.21,2547.21 3165,2590

## Silkscreen, mask and mechanical layers (free items; w line width, h text height)
Mechanical 1:
  lines w10: 2090,2270 2090,3785 2125,3785 3385,3785 4349.14,3785 4355,3779.14 4355,2860.86 4349.14,2855 3405,2855 3405,2270 3385,2270 2090,2270